# EAGLE board entireboard_v3 (EAGLE 9.3.0)
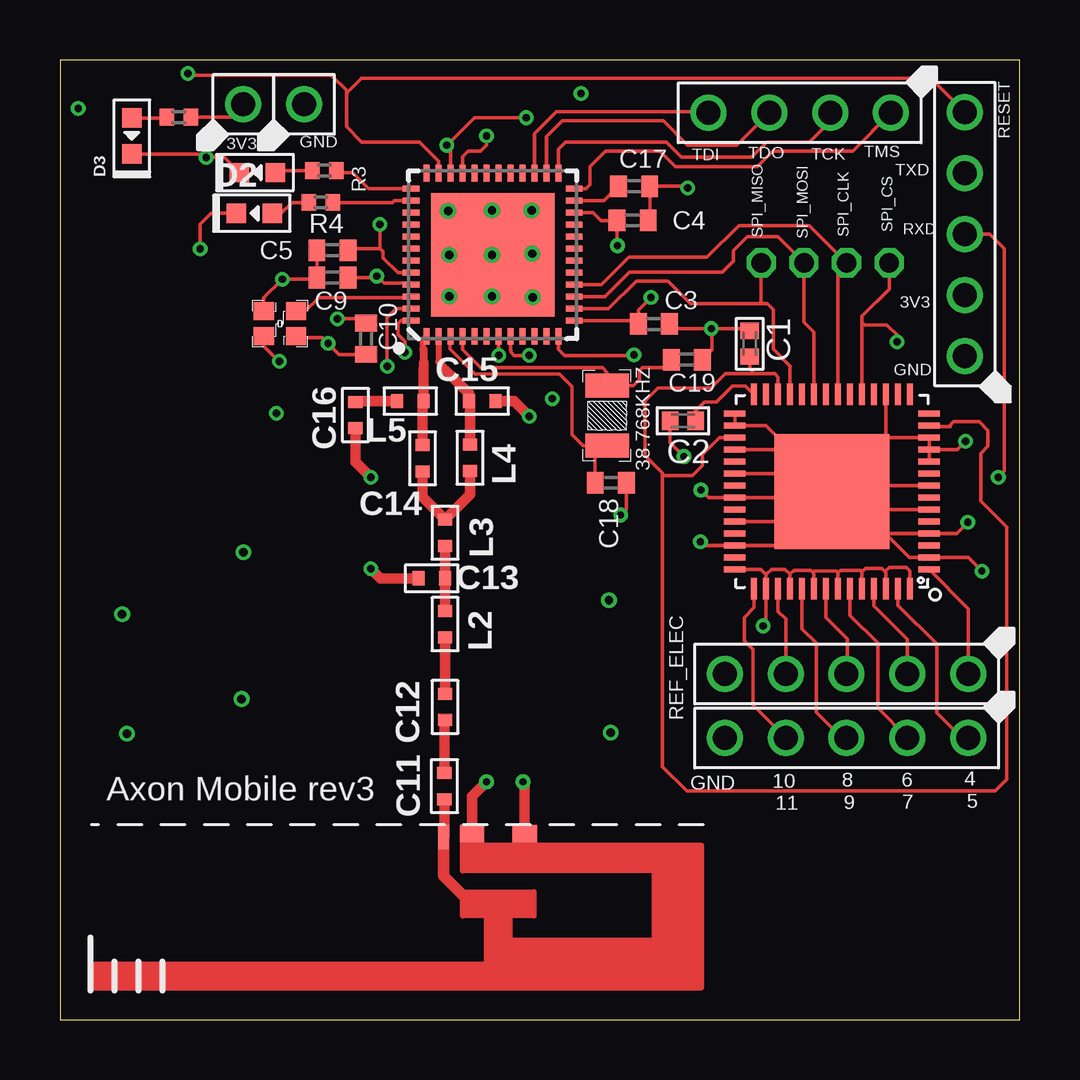
[diagram p0: board, top side]
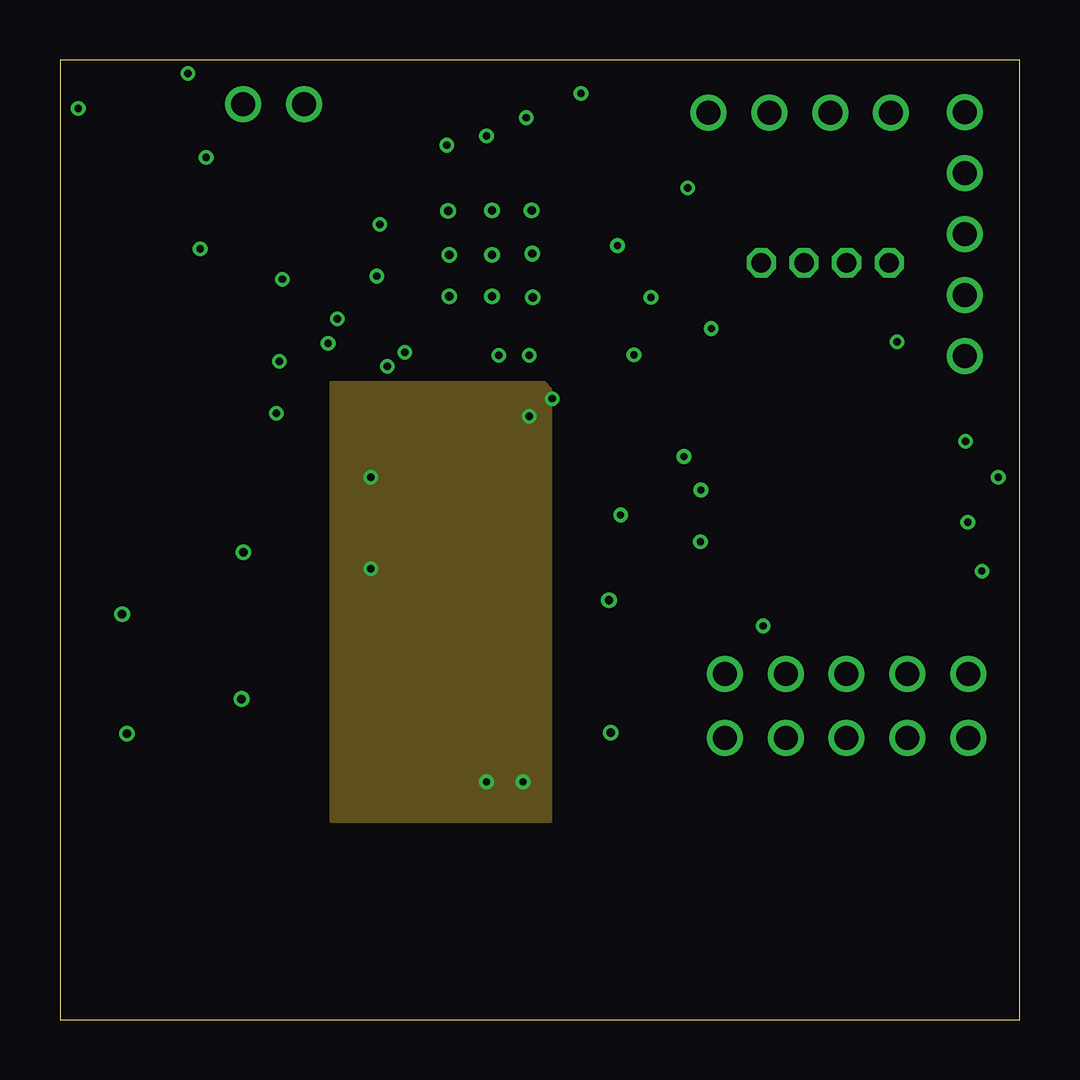
[diagram p1: board, inner layer Route2]
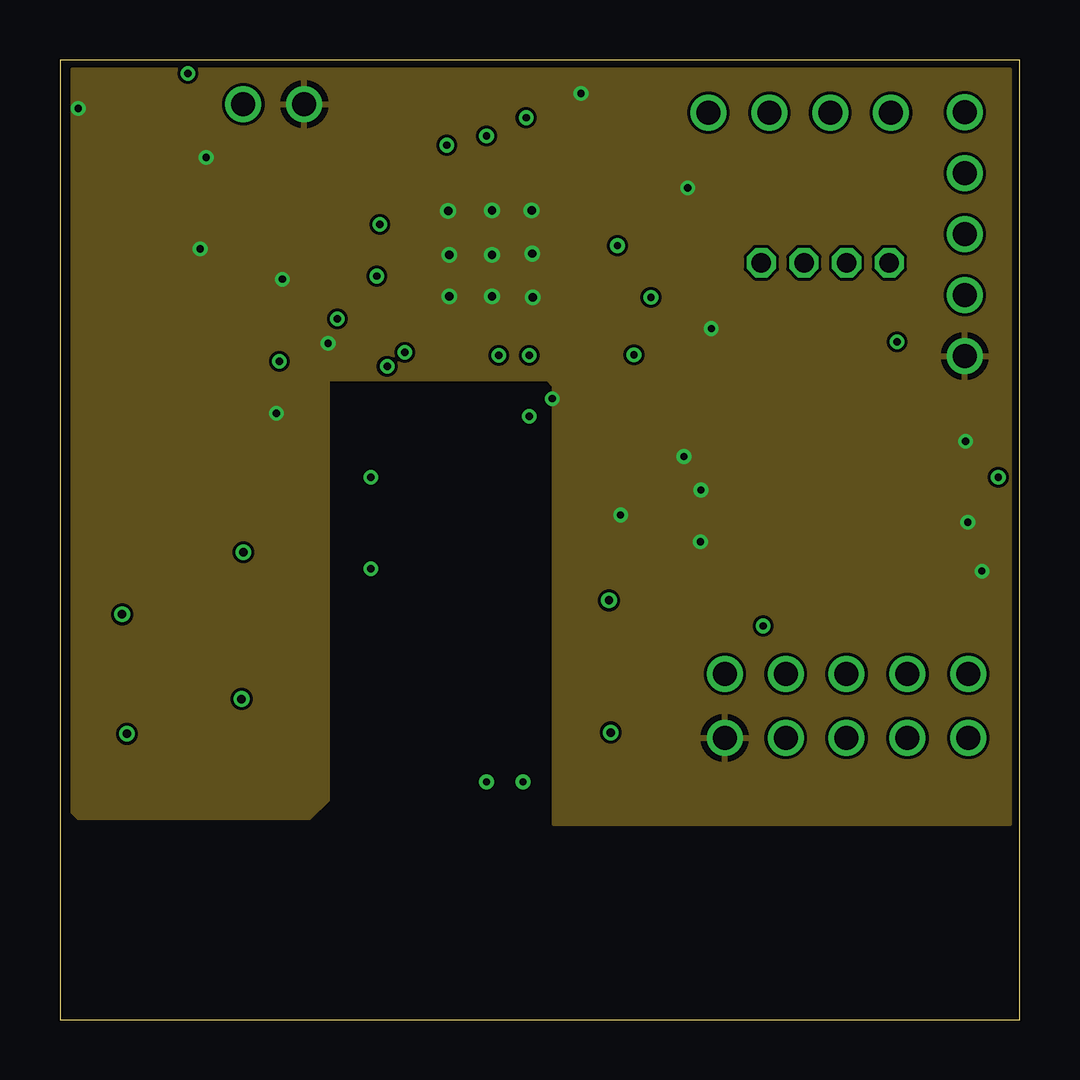
[diagram p2: board, inner layer Route15]
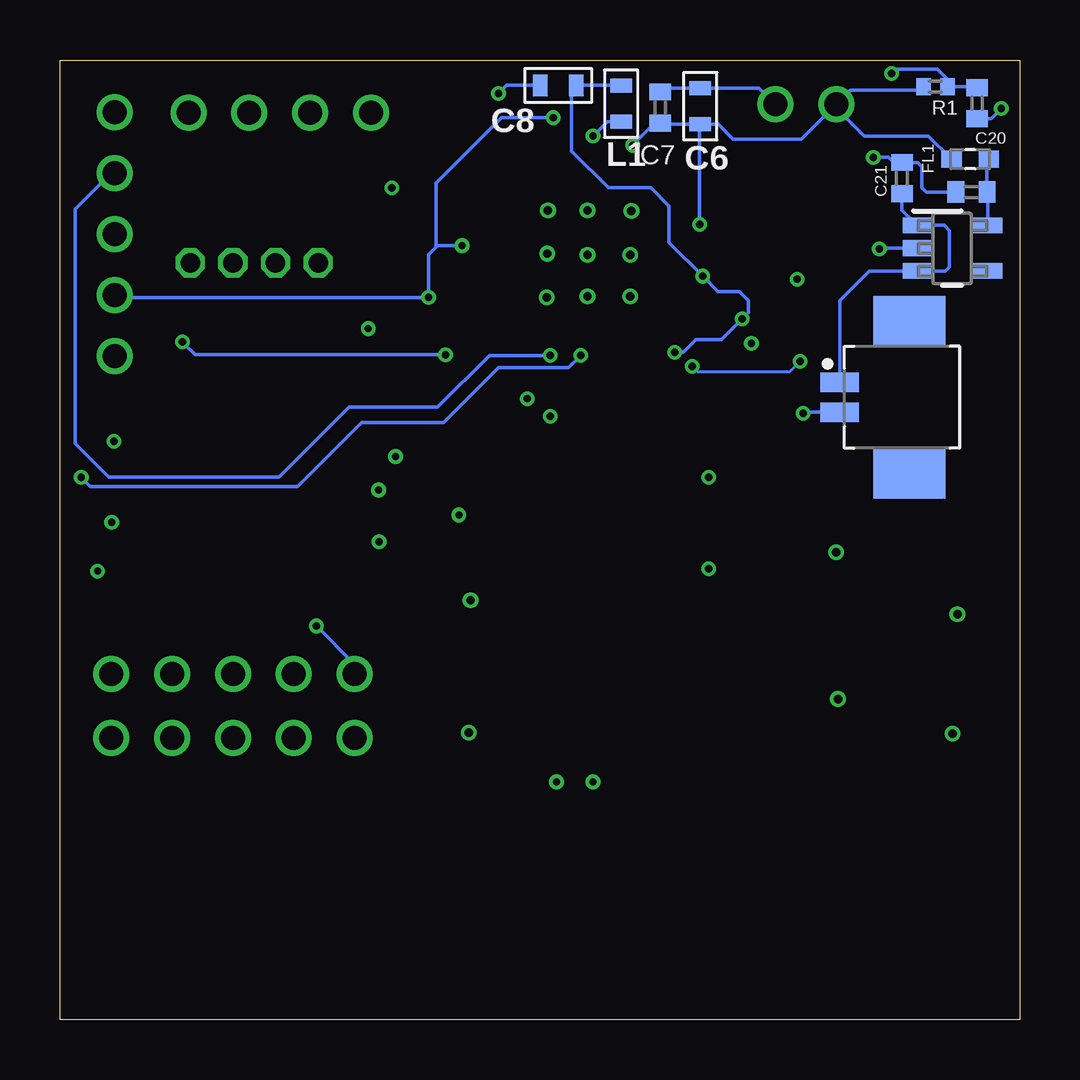
[diagram p3: board, bottom side, seen from below]

Size 40 x 40 mm. Coordinates in mm from the lower left corner, seen from the top.
Outline: 0,0 40,0 40,40 0,40 0,0
Copper layers (1*2*15*16): Top 0.035mm / dielectric 0.23mm / Route2 0.035mm / dielectric 0.93mm / Route15 0.035mm / dielectric 0.23mm / Bottom 0.035mm
Design rules "MF_Standard_4_Layer": minimum track width 5mil, minimum drill 12mil, track to track 5mil, track to pad 5mil, pad to pad 5mil, via to via 5mil, smd to smd 0mil, copper to edge 10mil, drill to drill 10mil, minimum pad ring 6mil, minimum via ring 6mil, stop-mask expansion 2mil, vias tented up to drill 25mil, thermal gap 10mil
Net classes: 1 thick: width 1.016 mm; 2 power: width 0.61 mm

## Footprints (pad centres in the part's own frame; a part is rotated, then mirrored left to right if it is on the bottom)
PTH_2.54MM_01X01 = drill 1: P$1 0,0
2-SMD = smd 1 x 1.8: P$1 -1.25,0; P$2 1.25,0
4-SMD = smd 0.85 x 0.75: P$1 -0.675,-0.525; P$2 0.675,-0.525; P$3 0.675,0.525; P$4 -0.675,0.525
0402 = smd 0.686 x 0.762: 1 -0.533,0; 2 0.533,0
C0402 = smd 0.7 x 0.9: 1 -0.65,0; 2 0.65,0
C0603 = smd 0.6 x 0.9: P$1 -0.75,0; P$2 0.75,0
C0402' = smd 0.5 x 0.6: P$1 -0.55,0; P$2 0.55,0
LED0603 = smd 0.8 x 0.8: ANODE 0.75,0; CATHODE -0.75,0
INDC1608X95 = smd 0.85 x 0.7: 1 -0.775,0; 2 0.775,0
PTH_2.54MM_01X05 = drill 1: P$1 -5.08,0; P$2 -2.54,0; P$3 0,0; P$4 2.54,0; P$5 5.08,0
PTH_2.54MM_01X04 = drill 1: P$1 -3.81,0; P$2 -1.27,0; P$3 1.27,0; P$4 3.81,0
L0603 = smd 0.6 x 0.9: P$1 -0.75,0; P$2 0.75,0
L0402 = smd 0.5 x 0.6: P$1 -0.55,0; P$2 0.55,0
MOLEX_0532610271 = smd 0.8 x 1.6: 1 0.625,0; 2 -0.625,0 | smd 2.1 x 3: 3 -3.175,-2.9; 4 3.175,-2.9
R0402 = smd 0.6 x 0.7: 1 -0.5,0; 2 0.5,0
RHD2000_EVAL_BOARD_TESTPOINT_SMALL = drill 0.813 octagon: 1 0,0
DBV0005A_M = smd 1.2 x 0.65: 1 -1.475,0.95; 2 -1.475,0; 3 -1.475,-0.95; 4 1.475,-0.95; 5 1.475,0.95
QFN56_8_X_8_LARGE = smd 0.9 x 0.25: 1 -4.05,3.25; 2 -4.05,2.75; 3 -4.05,2.25; 4 -4.05,1.75; 5 -4.05,1.25; 6 -4.05,0.75; 7 -4.05,0.25; 8 -4.05,-0.25; 9 -4.05,-0.75; 10 -4.05,-1.25; 11 -4.05,-1.75; 12 -4.05,-2.25; 13 -4.05,-2.75; 14 -4.05,-3.25; 29 4.05,-3.25; 30 4.05,-2.75; 31 4.05,-2.25; 32 4.05,-1.75; 33 4.05,-1.25; 34 4.05,-0.75; 35 4.05,-0.25; 36 4.05,0.25; 37 4.05,0.75; 38 4.05,1.25; 39 4.05,1.75; 40 4.05,2.25; 41 4.05,2.75; 42 4.05,3.25 | smd 0.25 x 0.9: 15 -3.25,-4.05; 16 -2.75,-4.05; 17 -2.25,-4.05; 18 -1.75,-4.05; 19 -1.25,-4.05; 20 -0.75,-4.05; 21 -0.25,-4.05; 22 0.25,-4.05; 23 0.75,-4.05; 24 1.25,-4.05; 25 1.75,-4.05; 26 2.25,-4.05; 27 2.75,-4.05; 28 3.25,-4.05; 43 3.25,4.05; 44 2.75,4.05; 45 2.25,4.05; 46 1.75,4.05; 47 1.25,4.05; 48 0.75,4.05; 49 0.25,4.05; 50 -0.25,4.05; 51 -0.75,4.05; 52 -1.25,4.05; 53 -1.75,4.05; 54 -2.25,4.05; 55 -2.75,4.05; 56 -3.25,4.05 | smd 4.8 x 4.8: CENTER 0,0
CC2652R1_QFN-48 = smd 0.7 x 0.25: 1 -3.4,2.75; 2 -3.4,2.25; 3 -3.4,1.75; 4 -3.4,1.25; 5 -3.4,0.75; 6 -3.4,0.25; 7 -3.4,-0.25; 8 -3.4,-0.75; 9 -3.4,-1.25; 10 -3.4,-1.75; 11 -3.4,-2.25; 12 -3.4,-2.75; 25 3.4,-2.75; 26 3.4,-2.25; 27 3.4,-1.75; 28 3.4,-1.25; 29 3.4,-0.75; 30 3.4,-0.25; 31 3.4,0.25; 32 3.4,0.75; 33 3.4,1.25; 34 3.4,1.75; 35 3.4,2.25; 36 3.4,2.75 | smd 0.25 x 0.7: 13 -2.75,-3.4; 14 -2.25,-3.4; 15 -1.75,-3.4; 16 -1.25,-3.4; 17 -0.75,-3.4; 18 -0.25,-3.4; 19 0.25,-3.4; 20 0.75,-3.4; 21 1.25,-3.4; 22 1.75,-3.4; 23 2.25,-3.4; 24 2.75,-3.4; 37 2.75,3.4; 38 2.25,3.4; 39 1.75,3.4; 40 1.25,3.4; 41 0.75,3.4; 42 0.25,3.4; 43 -0.25,3.4; 44 -0.75,3.4; 45 -1.25,3.4; 46 -1.75,3.4; 47 -2.25,3.4; 48 -2.75,3.4 | smd 5.15 x 5.15: EGP 0,0
DN007+0 = smd 0.46 x 1: FEED 2.22,-2.8 | smd 1.01 x 0.74: GND -1.16,-2.93; GND@1 1.035,-2.93

## Placement (x,y rotation side)
3.3V  MF-CON-2.54mm-01x01  [PTH_2.54MM_01X01]  7.65,38.15 0 top
38.768KHZ  EPSON_32.768KHZ_CRYSTAL  [2-SMD]  22.81,25.17 90 top
48MHZ  NDK_48MHZ_CRYSTAL  [4-SMD]  9.17,29.01 0 top
C1  100n  [0402]  28.75,28.17 90 top
C2  10n  [0402]  25.97,24.96 180 top
C3  0.1uF  [C0402]  24.76,28.99 0 top
C4  0.1uF  [C0402]  23.87,33.31 0 top
C5  0.1uF  [C0402]  11.36,32.07 180 top
C6  22uF  [C0603]  13.31,38.07 90 bottom
C7  0.1uF  [C0402]  14.97,38.02 90 bottom
C8  22uF  [C0603]  19.23,38.94 180 bottom
C9  0.1uF  [C0402]  11.36,30.93 180 top
C10  0.1uF  [C0402]  12.76,28.38 270 top
C11  1.8pF  [C0402']  16.03,9.73 270 top
C12  12pF  [C0402']  16.05,13.03 270 top
C13  1pF  [C0402']  15.49,18.39 180 top
C14  1pF  [C0402']  15.11,23.39 270 top
C15  1pF  [C0402']  17.6,25.78 0 top
C16  12pF  [C0402']  12.32,25.2 270 top
C17  1uF  [C0402]  23.93,34.74 0 top
C18  12pF  [C0402]  22.96,22.38 0 top
C19  12pF  [C0402]  26.14,27.51 0 top
C20  0.1uF  [C0402]  1.77,38.2 270 bottom
C21  1uF  [C0402]  4.9,35.08 90 bottom
C22  1uF  [C0402]  2.01,34.49 180 bottom
D1  [LED0603]  8.23,35.31 0 top
D2  [LED0603]  8.1,33.6 0 top
D3  [LED0603]  3,36.83 90 top
FL1  BLM18HE152SN1D  [INDC1608X95]  2.06,35.86 180 bottom
GND  MF-CON-2.54mm-01x01  [PTH_2.54MM_01X01]  10.19,38.15 0 top
J1  MF-CON-2.54mm-01x05  [PTH_2.54MM_01X05]  32.79,11.73 180 top
J2  MF-CON-2.54mm-01x05  [PTH_2.54MM_01X05]  37.72,32.74 90 top
J3  MF-CON-2.54mm-01x04  [PTH_2.54MM_01X04]  30.84,37.8 180 top
J4  MF-CON-2.54mm-01x05  [PTH_2.54MM_01X05]  32.79,14.4 180 top
L1  6.8uH  [L0603]  16.61,38.18 90 bottom
L2  2nH  [L0402]  16.05,16.48 270 top
L3  2nH  [L0402]  16.05,20.29 270 top
L4  2.4nH  [L0402]  17.09,23.42 270 top
L5  2.4nH  [L0402]  14.61,25.78 180 top
P1  0532610271  [MOLEX_0532610271]  7.5,25.94 90 bottom
R1  100k  [R0402]  3.51,38.89 180 bottom
R2  [R0402]  4.95,37.62 180 top
R3  [R0402]  11.02,35.38 180 top
R4  [R0402]  10.87,34.06 180 top
SPI_CLK  RHD2000_EVAL_BOARD_TESTPOINT_SMALL  [RHD2000_EVAL_BOARD_TESTPOINT_SMALL]  32.79,31.55 0 top
SPI_CS  RHD2000_EVAL_BOARD_TESTPOINT_SMALL  [RHD2000_EVAL_BOARD_TESTPOINT_SMALL]  34.57,31.55 0 top
SPI_MISO  RHD2000_EVAL_BOARD_TESTPOINT_SMALL  [RHD2000_EVAL_BOARD_TESTPOINT_SMALL]  29.24,31.55 0 top
SPI_MOSI  RHD2000_EVAL_BOARD_TESTPOINT_SMALL  [RHD2000_EVAL_BOARD_TESTPOINT_SMALL]  31.01,31.55 0 top
U1  TPS7A0508PDBVRDBV0005A_M  [DBV0005A_M]  2.79,32.16 0 bottom
U2  RHD2216_QFN  [QFN56_8_X_8_LARGE]  32.18,22.01 180 top
U$1  CC2652R1  [CC2652R1_QFN-48]  18.03,31.88 90 top
U$2  INVERTED_F_ANTENNA+0  [DN007+0]  18.21,4.82 180 top

## Library data of the parts
3.3V GND = AxonMobile; HOUSEPART: YES; MPN: MF-CON-2.54mm-01x01; POPULATE: 1; URL: https://factory.macrofab.com/part/MF-CON-2.54mm-01x01
38.768KHZ 48MHZ SPI_CLK SPI_CS SPI_MISO SPI_MOSI U$1 = AxonMobile
C1 C2 = RHD2000_eval_board
C3-C5 C7 C9 C10 C17-C22 = adafruit
C6 C8 C11-C16 L1-L5 = MF_Passives; POPULATE: 1
D1-D3 = MF_LEDs; HOUSEPART: NO; POPULATE: 1
FL1 = BLM18HE152SN1D; DIGI-KEY_PART_NUMBER: 490-5216-1-ND; DIGI-KEY_PURCHASE_URL: https://www.digikey.com/product-detail/en/murata-electronics-north-america/BLM18HE152SN1D/490-5216-1-ND/1948392?utm_source=snapeda&utm_medium=aggregator&utm_campaign=symbol; MF: Murata Electronics; MP: BLM18HE152SN1D; PACKAGE: 0603 Samtec
J1 J2 J4 = MF_Connectors; HOUSEPART: YES; MPN: MF-CON-2.54mm-01x05; POPULATE: 1; URL: https://factory.macrofab.com/part/MF-CON-2.54mm-01x05
J3 = MF_Connectors; HOUSEPART: YES; MPN: MF-CON-2.54mm-01x04; POPULATE: 1; URL: https://factory.macrofab.com/part/MF-CON-2.54mm-01x04
P1 = 0532610271; DESCRIPTION: 1.25mm _.049_ Pitch PicoBlade Header, Surface Mount, Right Angle, Lead-free, 2 Circuits; DIGI-KEY_PART_NUMBER: WM7620CT-ND; DIGI-KEY_PURCHASE_URL: https://www.digikey.com/product-detail/en/molex-llc/0532610271/WM7620CT-ND/699107?utm_source=snapeda&utm_medium=aggregator&utm_campaign=symbol; MF: Molex, LLC; MP: 0532610271; PACKAGE: None
R1-R4 = AxonMobile; SPICEPREFIX: R
U1 = yka0004
U2 = RHD2000
U$2 = antenna

## Nets
DCDC_SW: L1.P$1 U$1.33
GND: 48MHZ.P$2 48MHZ.P$4 C1.2 C2.2 C3.2 C4.2 C5.2 C6.P$2 C7.2 C8.P$2 C9.2 C10.2 C13.P$2 C15.P$2 C16.P$2 C17.2 C18.2 C19.2 C20.2 C21.2 C22.2 D1.CATHODE D2.CATHODE D3.CATHODE GND.P$1 J1.P$5 J2.P$1 P1.2 U1.2 U2.2 U2.4 U2.6 U2.8 U2.10 U2.11 U2.12 U2.17 U2.29 U2.30 U2.32 U2.34 U2.36 U2.38 U2.40 U2.CENTER U$1.EGP U$2.GND U$2.GND@1
JTAG_TCK: J3.P$2 U$1.25
JTAG_TDI: J3.P$4 U$1.27
JTAG_TDO: J3.P$3 U$1.26
JTAG_TMS: J3.P$1 U$1.24
N$1: C17.1 U$1.23
N$2: D1.ANODE R3.2
N$3: 48MHZ.P$1 U$1.47
N$4: 48MHZ.P$3 U$1.46
N$5: 38.768KHZ.P$1 C18.1 U$1.3
N$6: C11.P$1 C12.P$2
N$7: C12.P$1 L2.P$2
N$8: C13.P$1 L2.P$1 L3.P$2
N$9: C14.P$2 L3.P$1 L4.P$2
N$10: 38.768KHZ.P$2 C19.1 U$1.4
N$11: C11.P$2 U$2.FEED
N$12: C16.P$1 L5.P$2
N$13: R4.1 U$1.38
N$14: C21.1 P1.1 U1.1 U1.3
N$15: D2.ANODE R4.2
N$16: D3.ANODE R2.2
N$17: R3.1 U$1.37
N$18: J1.P$4 U2.43
N$19: J4.P$4 U2.45
N$20: J1.P$3 U2.47
N$21: J4.P$3 U2.49
N$22: J1.P$2 U2.51
N$23: J4.P$2 U2.53
N$24: J1.P$1 U2.55
N$25: J4.P$1 U2.1
N$42: C2.1 U2.28
NC: U1.4
REF_ELEC: J4.P$5 U2.42 U2.44 U2.46 U2.48 U2.50 U2.52 U2.54 U2.56
RF_N: C15.P$1 L4.P$1 U$1.2
RF_P: C14.P$1 L5.P$1 U$1.1
RXD: J2.P$3 U$1.7
SPI_CLK: SPI_CLK.1 U2.21 U$1.16
SPI_CS_TP: SPI_CS.1 U2.19 U$1.12
SPI_MISO: SPI_MISO.1 U2.25 U$1.14
SPI_MOSI: SPI_MOSI.1 U2.23 U$1.15
TXD: J2.P$4 U$1.8
VCC: C1.1 U2.13 U2.26 U2.31
VDDR: C8.P$1 C9.1 C10.1 L1.P$2 U$1.45 U$1.48
VDDS3V3: 3.3V.P$1 C3.1 C4.1 C5.1 C6.P$1 C7.1 FL1.2 J2.P$2 R1.2 R2.1 U$1.13 U$1.22 U$1.34 U$1.44
WMCU_RESET: C20.1 J2.P$5 R1.1 U$1.35
WMCU_VDD: C22.1 FL1.1 U1.5

## Tracks (layer width: path | path; a pad name or v marks a point on that pad's centre or on a via)
DCDC_SW  (via drill 0.3)
  Top 0.152: v17.78,36.83 17.78,36.45 17.53,36.2 17.02,36.2 16.78,35.96 U$1.33
  Bottom 0.152: L1.P$1 17.18,37.43 v17.78,36.83
GND  (via drill 0.3, 0.35)
  Top 0.127: U$1.EGP 19.63,31.88 v19.68,31.93 | U$1.EGP 18.03,33.71 v18.01,33.73 | U$1.EGP 19.66,33.5 v19.66,33.73 | U$1.EGP 16.2,33.71 v16.18,33.71 | U$1.EGP v16.23,31.88 | U$1.EGP 16.31,30.15 v16.23,30.15 | U$1.EGP 18.03,30.18 v18.01,30.15 | U$1.EGP 19.71,30.2 v19.71,30.1
  Top 0.152: 48MHZ.P$2 9.91,28.42 10.95,28.42 v11.18,28.19 11.64,27.73 C10.2 | 48MHZ.P$4 8.49,30.08 v9.27,30.86 10.65,30.86 C9.2 C5.2 | v5.84,32.13 5.84,33.15 6.3,33.6 D2.CATHODE | D1.CATHODE 6.84,35.94 v6.1,35.94 5.96,36.08 D3.CATHODE | C4.2 24.58,33.38 C17.2 26.1,34.74 v26.16,34.67 | C1.2 28.65,28.8 27.18,28.8 | 27.18,28.8 v27.15,28.8 25.6,28.8 C3.2 | 30.93,20.76 29.93,19.76 U2.40 26.85,19.76 v26.7,19.91 | U2.38 30.93,20.76 | 30.93,20.76 31.93,21.76 | 31.93,21.76 U2.36 27.03,21.76 v26.72,22.07 | 31.93,21.76 32.1,21.93 | 32.1,21.93 32.16,21.99 | U2.34 31.43,22.76 U2.CENTER | U2.32 30.43,23.76 U2.CENTER | U2.CENTER 29.43,24.76 U2.30 U2.29 | U2.17 34.43,24.26 | 34.43,24.26 U2.CENTER | 34.43,24.26 U2.12 U2.11 | U2.8 32.43,22.26 32.16,21.99 | U2.6 32.89,21.26 32.16,21.99 | 34.4,20.26 U2.4 37.38,20.26 v37.85,20.73 | 32.1,21.93 33.76,20.26 34.4,20.26 | 34.4,20.26 35.4,19.26 U2.2 37.86,19.26 v38.43,18.69 | U2.10 U2.11 | U2.11 37.4,23.76 v37.74,24.11 | C19.2 27.18,27.9 27.18,28.8 | C2.2 25.43,24.05 v26.01,23.47 | C18.2 23.61,21.27 v23.37,21.03
  Top 0.445: C15.P$2 18.92,25.78 v19.56,25.15 | C16.P$2 12.32,23.24 v12.95,22.61 | C13.P$2 13.36,18.39 v12.95,18.8 | U$2.GND 19.37,9.84 v19.3,9.91 | U$2.GND@1 17.18,9.3 v17.78,9.91
  Bottom 0.152: P1.2 8.98,25.31 v9.02,25.27 | U1.2 5.82,32.16 v5.84,32.13 | C22.2 3.89,34.49 4.06,34.67 4.06,35.56 4.23,35.73 C21.2 5.25,35.73 5.46,35.94 v6.1,35.94 | C20.2 1.19,37.55 v0.76,37.97 | C8.P$2 21.39,38.94 v21.72,38.61 | GND.P$1 10.86,38.83 C6.P$2 14.82,38.83 C7.2
  other vias: 20.52,25.88 18.01,31.88
  pour Route15: 0.51,39.62 0.51,8.64 0.76,8.38 10.41,8.38 11.18,9.14 11.18,26.67 20.32,26.67 20.57,26.42 20.57,8.13 39.62,8.13 39.62,39.62
  pour Route2: 11.3,8.26 20.45,8.26 20.45,26.29 20.19,26.54 11.3,26.54
JTAG_TCK
  Top 0.152: J3.P$2 32.11,37.44 31.24,36.58 29.46,36.58 28.83,35.94 25.91,35.94 25.27,36.58 21.08,36.58 20.78,36.28 U$1.25
JTAG_TDI
  Top 0.152: J3.P$4 26.98,37.85 20.7,37.85 19.78,36.93 U$1.27
JTAG_TDO
  Top 0.152: J3.P$3 28.22,36.45 26.16,36.45 25.15,37.47 20.95,37.47 20.28,36.79 U$1.26
JTAG_TMS
  Top 0.152: J3.P$1 33.05,36.2 29.72,36.2 29.08,35.56 25.65,35.56 25.02,36.2 22.73,36.2 22.1,35.56 22.1,34.8 21.93,34.63 U$1.24
N$1
  Top 0.152: U$1.23 22.68,34.13 C17.1
N$2
  Top 0.152: D1.ANODE 9.06,35.38 R3.2
N$3  (via drill 0.3)
  Top 0.152: v13.64,27.23 13.64,29.26 14.01,29.63 U$1.47 | 48MHZ.P$1 8.49,28.08 v9.14,27.43
  Bottom 0.127: v13.64,27.23 13.41,27 9.58,27 v9.14,27.43
N$4
  Top 0.152: 48MHZ.P$3 10.23,29.53 10.79,30.1 14.61,30.1 U$1.46
N$5
  Top 0.152: U$1.3 16.26,28.5 16.26,27.94 17.3,26.9 20.83,26.9 21.34,26.39 21.34,24.38 21.8,23.92 38.768KHZ.P$1 22.31,23.42 C18.1
N$6
  Top 0.445: C11.P$1 16.03,12.46 C12.P$2
N$7
  Top 0.445: C12.P$1 L2.P$2
N$8
  Top 0.445: L2.P$1 16.05,18.38 C13.P$1 L3.P$2
N$9
  Top 0.445: C14.P$2 15.11,21.78 L3.P$1 17.09,21.89 L4.P$2
N$10
  Top 0.152: U$1.4 16.78,27.92 17.53,27.18 22.61,27.18 22.81,26.98 38.768KHZ.P$2 23.91,26.42 24.16,26.67 24.16,27.05 24.28,27.18 25.16,27.18 C19.1
N$11
  Top 0.445: U$2.FEED 16.03,7.65 C11.P$2
N$12
  Top 0.445: L5.P$2 12.35,25.78 C16.P$1
N$13
  Top 0.152: R4.1 13.87,34.06 13.93,34.13 U$1.38
N$14
  Bottom 0.152: P1.1 7.5,29.97 6.26,31.21 U1.3 3.08,31.21 2.92,31.37 2.92,32.89 3.13,33.11 U1.1 4.9,33.74 C21.1
N$15
  Top 0.152: D2.ANODE 9.22,33.6 9.68,34.06 R4.2
N$16
  Top 0.152: D3.ANODE 4.42,37.58 R2.2
N$17
  Top 0.152: R3.1 11.6,35.31 12.19,35.31 12.87,34.63 U$1.37
N$18
  Top 0.152: U2.43 28.93,17.17 28.52,16.76 28.52,15.77 28.88,15.42 28.88,13.11 J1.P$4
N$19
  Top 0.152: U2.45 29.93,17.01 30.25,16.69 J4.P$4
N$20
  Top 0.152: U2.47 30.93,16.29 31.52,15.7 31.52,12.8 32.59,11.73 J1.P$3
N$21
  Top 0.152: U2.49 31.93,16.76 32.82,15.88 32.82,14.43 J4.P$3
N$22
  Top 0.152: U2.51 32.93,16.85 34.09,15.7 34.09,12.98 J1.P$2
N$23
  Top 0.152: U2.53 33.93,17.25 35.33,15.85 J4.P$2
N$24
  Top 0.152: U2.55 34.93,17.27 36.55,15.65 36.55,12.78 37.59,11.73 J1.P$1
N$25
  Top 0.152: U2.1 37.87,17.12 J4.P$1
N$26  (via drill 0.35)
  other vias: 2.79,11.91
N$27  (via drill 0.35)
  other vias: 7.57,13.36
N$28  (via drill 0.35)
  other vias: 2.59,16.89
N$29  (via drill 0.35)
  other vias: 7.65,19.48
N$30  (via drill 0.35)
  other vias: 22.89,17.48
N$31  (via drill 0.35)
  other vias: 22.96,11.96
N$42
  Top 0.152: U2.28 28.58,26.42 28.04,26.42 27.36,25.73 26.87,25.73 26.5,25.36 C2.1
REF_ELEC  (via drill 0.3)
  Top 0.152: v29.31,16.41 29.43,16.53 U2.44 29.43,18.55 | U2.42 29.22,18.76 29.43,18.55 | 29.43,18.55 29.65,18.77 30.23,18.77 30.43,18.57 | 30.43,18.57 U2.46 | U2.48 31.43,18.58 31.38,18.63 | 31.38,18.63 31.29,18.72 30.59,18.72 30.43,18.57 | U2.50 32.43,18.62 | 32.43,18.62 32.36,18.69 31.45,18.69 31.38,18.63 | U2.52 33.43,18.66 | 33.43,18.66 33.38,18.72 32.53,18.72 32.43,18.62 | U2.54 34.43,18.63 34.39,18.67 | 34.39,18.67 34.27,18.8 33.56,18.8 33.43,18.66 | U2.56 35.43,18.7 35.28,18.85 34.57,18.85 34.39,18.67
  Bottom 0.152: v29.31,16.41 27.71,14.81 J4.P$5
RF_N
  Top 0.254: 15.8,27.41 15.8,28.46 U$1.2
  Top 0.305: 15.93,27.23 15.93,27.28 15.8,27.41
  Top 0.356: 16.1,27.05 15.93,27.23
  Top 0.406: 16.33,26.82 16.1,27.05
  Top 0.445: L4.P$1 17.09,25.74 C15.P$1 17.05,26.1 16.33,26.82
RF_P
  Top 0.254: 15.14,27.94 15.14,28.33 U$1.1
  Top 0.33: 15.14,27.94 15.16,27.91 15.16,27.38
  Top 0.406: 15.16,27.38 15.16,27.1
  Top 0.445: C14.P$1 15.11,25.74 L5.P$1 15.15,27.09 15.16,27.1
RXD  (via drill 0.3)
  Top 0.152: v39.12,22.61 39.37,22.86 39.37,32.13 38.76,32.74 J2.P$3 | U$1.7 v18.29,27.69
  Bottom 0.152: v18.29,27.69 18.8,27.18 21.72,27.18 24,24.89 25.55,24.89 27.43,24.89 30.1,22.23 38.73,22.23 v39.12,22.61
SPI_CLK
  Top 0.152: U2.21 32.43,31.19 SPI_CLK.1 31.24,33.1 28.3,33.1 26.98,31.77 23.72,31.77 22.57,30.63 U$1.16
SPI_CS_TP  (via drill 0.3)
  Top 0.152: U2.19 33.43,29.08 | 33.43,29.08 33.43,29.32 34.57,30.45 SPI_CS.1 | U$1.12 20.78,27.93 21.03,27.69 23.9,27.69 v23.93,27.71 | v34.9,28.25 34.9,28.52 34.47,28.96 33.56,28.96 33.43,29.08
  Bottom 0.152: v23.93,27.71 34.37,27.71 v34.9,28.25
SPI_MISO
  Top 0.152: SPI_MISO.1 29.21,31.57 29.21,29.95 29.31,29.84 | U2.25 30.43,27.21 30.45,27.23 29.74,27.94 29.74,29.59 29.49,29.84 29.31,29.84 | U$1.14 22.87,29.63 24.03,30.79 25.35,30.79 26.29,29.84 29.31,29.84
SPI_MOSI
  Top 0.152: U2.23 31.43,28.66 31.01,29.08 SPI_MOSI.1 29.92,32.64 28.65,32.64 28.07,32.05 28.07,31.62 27.61,31.17 23.75,31.17 22.71,30.13 U$1.15
TXD  (via drill 0.3)
  Top 0.152: v19.56,27.69 18.92,27.69 18.8,27.81 18.8,27.9 18.78,27.91 U$1.8
  Bottom 0.152: J2.P$4 37.87,35.28 39.37,33.78 39.37,24 37.97,22.61 30.86,22.61 27.94,25.53 24.26,25.53 22.1,27.69 v19.56,27.69
VCC
  Top 0.152: U2.26 29.93,26.79 29.79,26.92 28.96,26.92 | 28.96,26.92 28.75,27.13 C1.1 | 28.96,26.92 27.74,26.92 27.13,26.31 24.92,26.31 24.38,25.78 24.38,23.52 25.12,22.78 25.12,22.68 | U2.13 36.28,24.71 37.11,24.71 37.11,24.79 37.24,24.92 38.33,24.92 38.68,24.56 38.68,23.9 38.38,23.6 38.38,21.61 39.47,20.52 39.47,10.01 38.99,9.53 26.14,9.53 25.12,10.54 25.12,22.68 | U2.31 27.49,24.26 26.77,23.55 26.77,23.09 26.36,22.68 25.12,22.68
VDDR  (via drill 0.3)
  Top 0.152: C10.1 12.58,29.21 v11.56,29.21 | C9.1 13.15,30.93 v13.21,30.99 13.5,30.69 14.57,30.69 U$1.45 | U$1.48 14.22,29.13 14.07,28.98 14.1,28.96 14.1,28.55 14.38,28.27 v14.38,27.81
  Bottom 0.152: L1.P$2 16.62,38.94 C8.P$1 18.67,38.75 18.67,36.2 17.14,34.67 15.37,34.67 14.61,33.91 14.61,33.1 14.61,32.38 v13.21,30.99 12.57,30.35 11.68,30.35 11.3,29.97 11.3,29.46 v11.56,29.21 12.42,28.35 13.49,28.35 14.02,27.81 v14.38,27.81
VDDS3V3  (via drill 0.3)
  Top 0.152: R2.1 7.11,37.62 3.3V.P$1 | 13.34,32.13 12.07,32.13 C5.1 | 13.34,32.13 13.46,32 13.46,31.75 14.09,31.13 U$1.44 | 13.34,32.13 v13.34,33.15 | v24.64,30.1 24.11,29.57 C3.1 23.97,29.13 U$1.13 | v23.24,32.26 23.22,32.28 23.22,33.3 | v19.43,37.59 17.27,37.59 v16.13,36.45 16.28,36.29 U$1.34 | C4.1 23.22,33.3 | U$1.22 22.23,33.63 22.55,33.3 23.22,33.3
  Bottom 0.152: R1.2 4.16,38.73 7.06,38.73 3.3V.P$1 | 13.46,37.33 C6.P$1 12.59,37.33 12.57,37.34 11.94,36.7 9.09,36.7 3.3V.P$1 | 13.46,37.33 14.93,37.33 | 14.93,37.33 C7.1 | v13.34,33.15 13.34,37.2 13.46,37.33 | FL1.2 3.8,36.83 6.48,36.83 7.64,38 3.3V.P$1 | v16.13,36.45 15.25,37.33 14.93,37.33 | J2.P$2 37.62,30.1 v24.64,30.1 24.64,31.88 24.32,32.19 | v23.24,32.26 24.26,32.26 24.32,32.19 | 24.32,32.19 24.32,34.86 21.59,37.59 v19.43,37.59
WMCU_RESET  (via drill 0.3)
  Top 0.152: 11.94,38.61 11.94,37.21 12.57,36.58 14.99,36.58 15.78,35.78 U$1.35 | 11.94,38.61 11.94,38.73 11.3,39.37 5.41,39.37 v5.33,39.44 | 11.94,38.61 12.57,39.24 36.3,39.24 J2.P$5
  Bottom 0.152: C20.1 1.81,38.89 R1.1 2.97,38.85 2.97,39.16 3.43,39.62 5.15,39.62 v5.33,39.44
WMCU_VDD
  Bottom 0.152: U1.5 1.32,34.46 C22.1 1.36,35.79 FL1.1

## Text on the board
tPlace: Axon Mobile rev3
tNames: RESET | 3V3 | TDI | TDO | TCK | TMS | TXD | RXD | 3V3 | GND | REF_ELEC | GND | 10 | 8 | 6 | 4 | 11 | 9 | 7 | 5